# Altium PCB hermes2.PcbDoc
Units mm, origin at the board's own origin, x right, y up, seen from the top; angles counter-clockwise.
Board outline 24.7 x 46.36 mm, 4 copper layers (Top Layer, Layer 1, Layer 2, Bottom Layer), stack 0.603 mm thick; 16 components, 26 nets, 110 pads, 85 vias.
Unrouted connection lines stored in the file: 1.
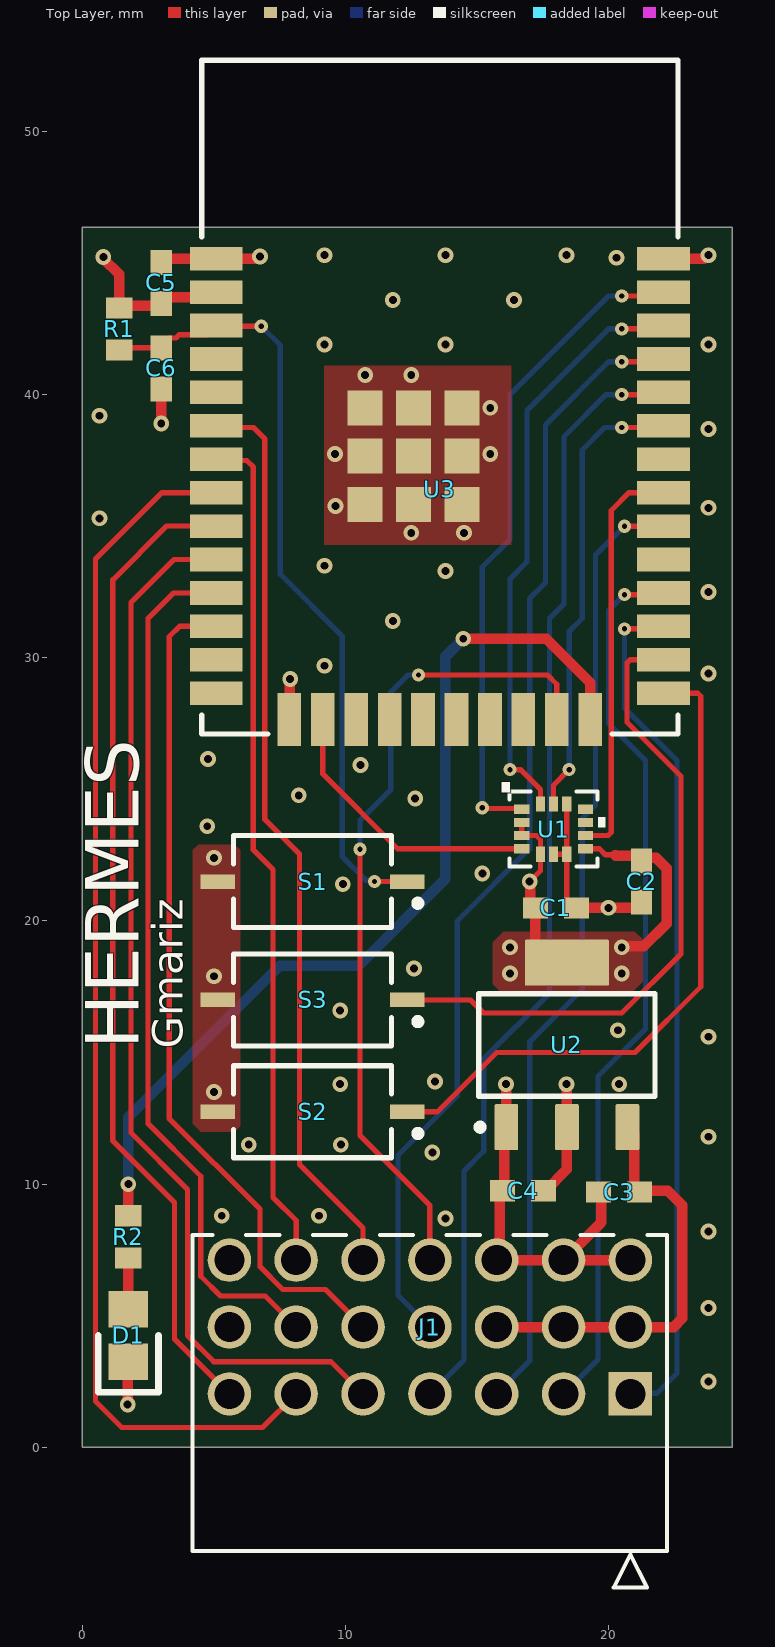
[diagram p0: Top Layer view]
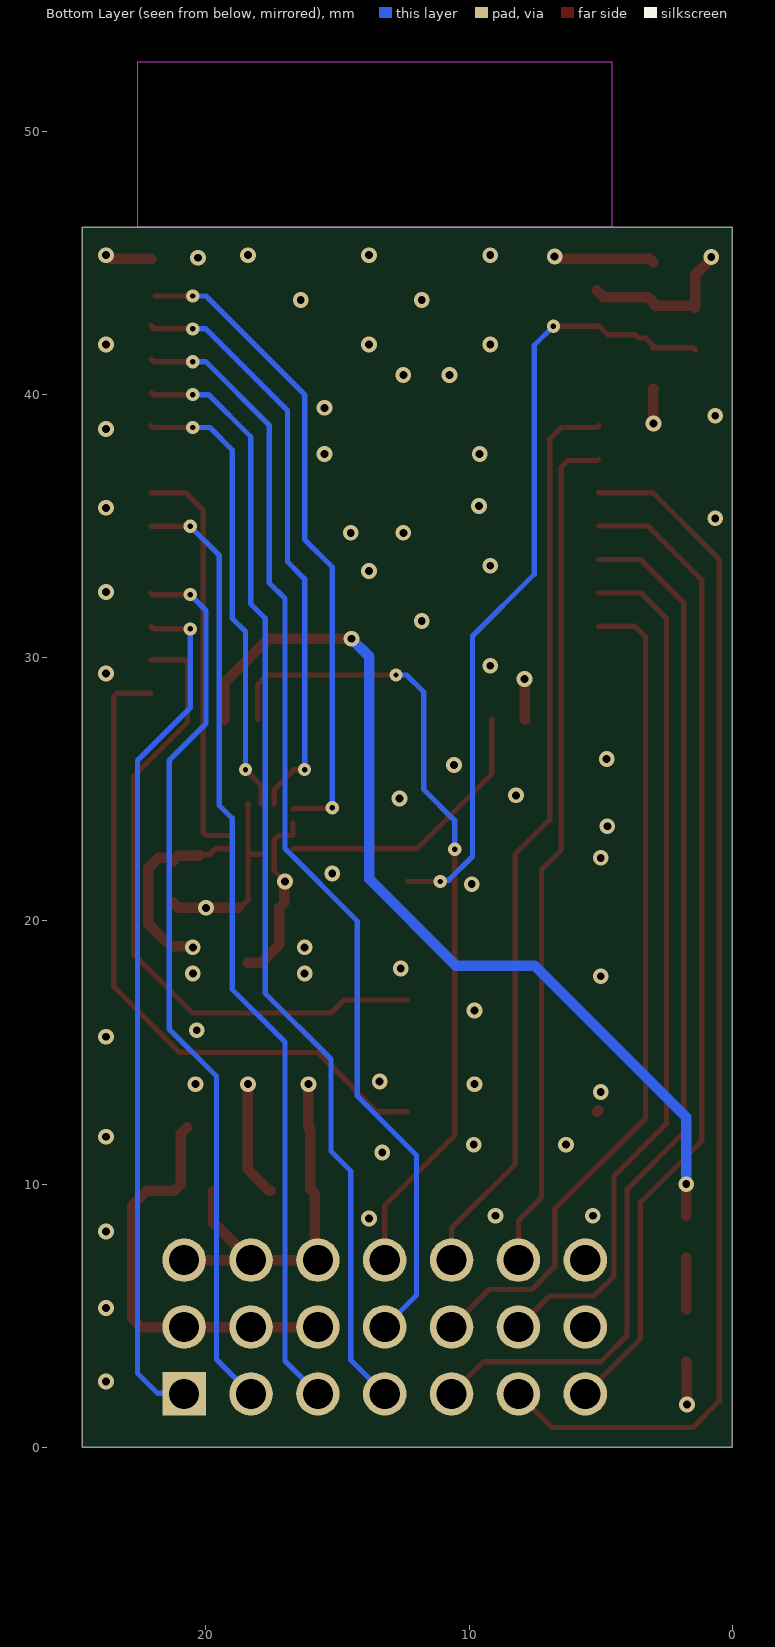
[diagram p1: Bottom Layer view, seen from below]
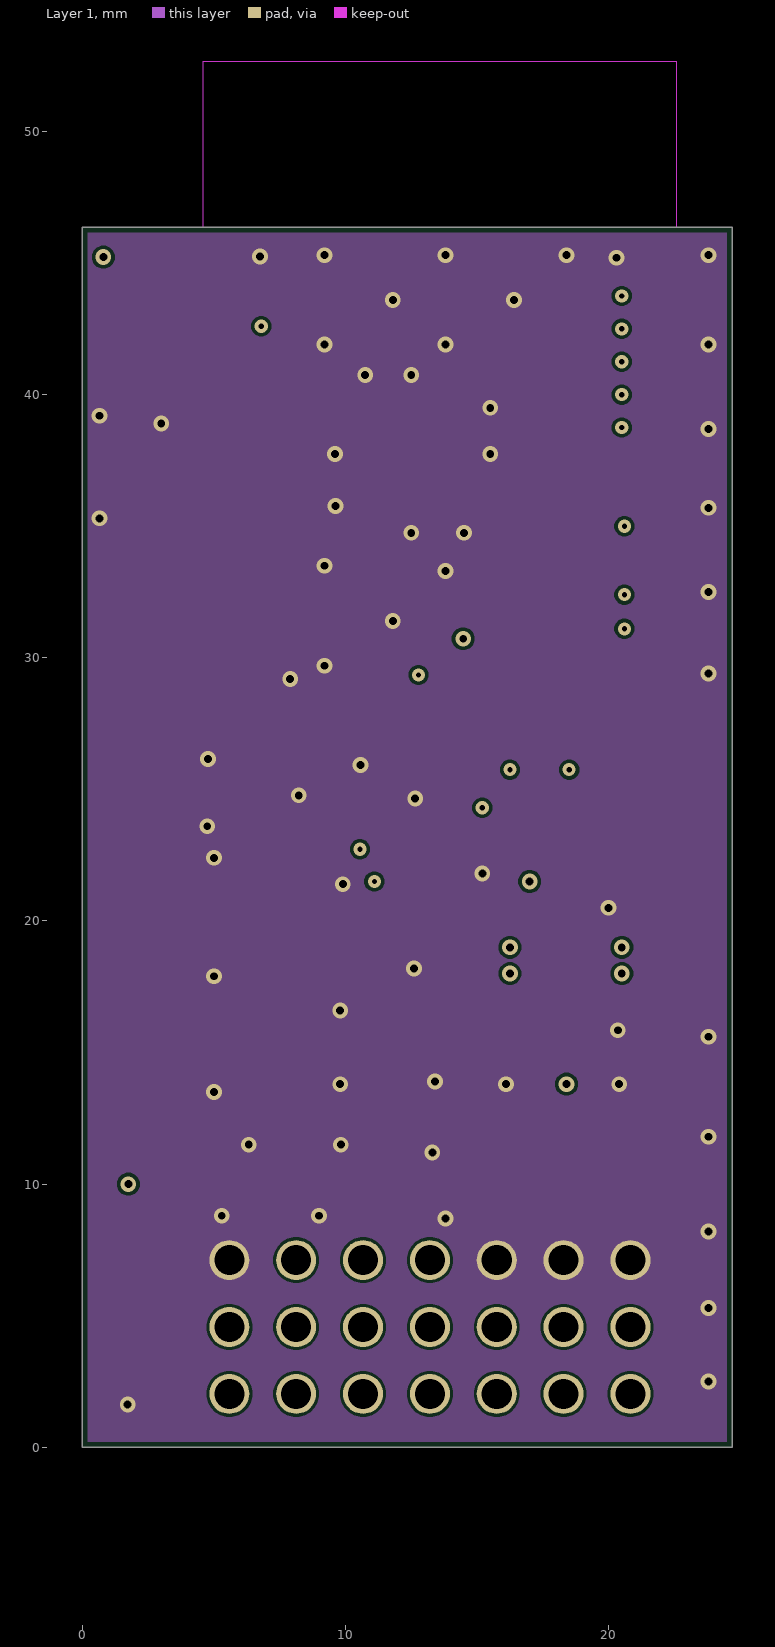
[diagram p2: Layer 1]
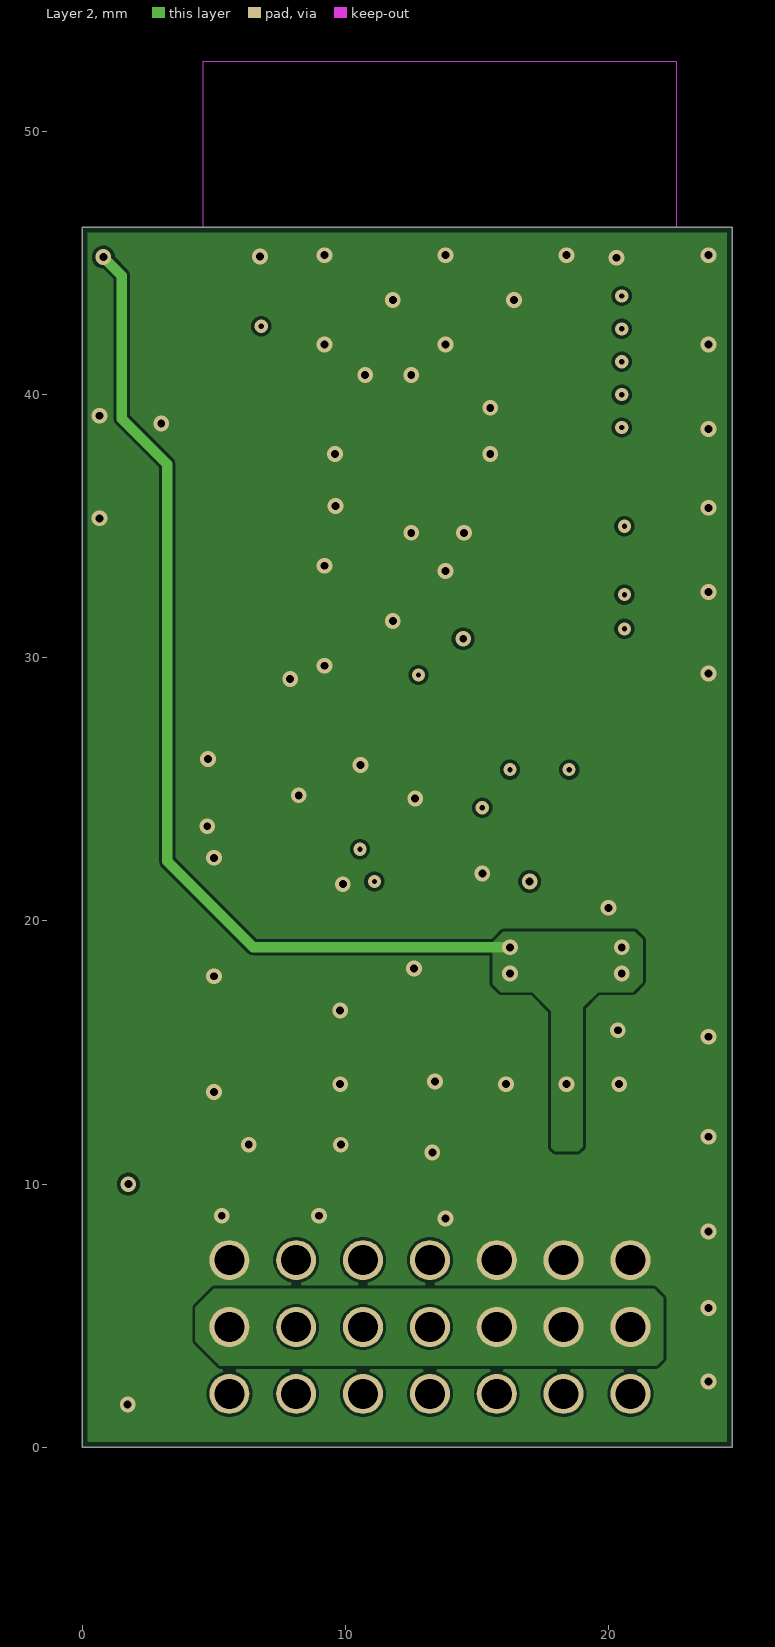
[diagram p3: Layer 2]
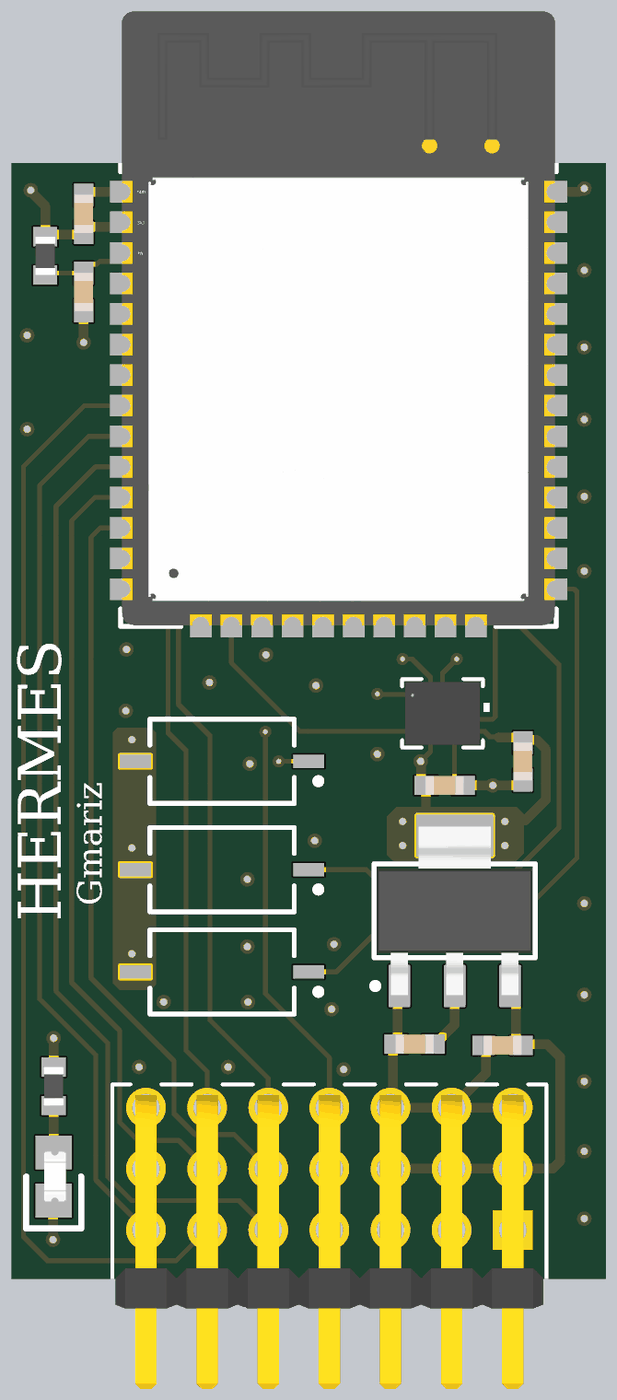
[diagram p4: 3D render of the assembled board from above, using the file's embedded part models]

## Layer stack, top to bottom
Top Solder: solder mask 0.0102, Solder Resist, Dk 3.5
Top Layer: signal copper 0.0356
Dielectric 2: prepreg 0.0711, PP-006, Dk 4.1
Layer 1: signal copper 0.035
Dielectric 1: dielectric 0.32, FR-4, Dk 4.8
Layer 2: signal copper 0.035
Dielectric 3: prepreg 0.0711, PP-006, Dk 4.1
Bottom Layer: signal copper 0.0356
Bottom Solder: solder mask 0.0102, Solder Resist, Dk 3.5

## Board outline
0,0 0,46.355 24.7,46.355 24.7,0

## Design rules (kind name [scope] priority, off if disabled: settings)
BoardOutlineClearance [All] p1: gap=0.2 ignorepadtopadclearanceinfootprint=FALSE
Clearance [All] p1: gap=0.102 ignorepadtopadclearanceinfootprint=FALSE except(0.127: Arc-Via Track-Via SMDPad-Via THPad-Via Via-Via Via-Fill Via-Poly Via-Region Via-Text; 0.25: Arc-Hole Track-Hole SMDPad-Hole THPad-Hole Via-Hole Fill-Hole Poly-Hole Region-Hole Text-Hole)
ComponentClearance [All] p1: gap=0.102 collisioncheckmode=3 verticalgap=0.102 showdistances=TRUE
DiffPairsRouting [All] p1: maxlimit=0.102 minlimit=0.102 mostfreqgap=0.102 toplayer_minwidth=0.102 toplayer_maxwidth=1816.048 toplayer_prefwidth=0.102 midlayer1_minwidth=0.102 midlayer1_maxwidth=1816.048 midlayer1_prefwidth=0.102 midlayer2_minwidth=0.102 midlayer2_maxwidth=1816.048 midlayer2_prefwidth=0.102 bottomlayer_minwidth=0.102 bottomlayer_maxwidth=1816.048 bottomlayer_prefwidth=0.102 maxuncoupledlength=12.7
Height [All] p1: minheight=0 maxheight=1816.048 prefheight=12.7
HoleSize [All] p1: absolutevalues=TRUE maxlimit=6.3 minlimit=0.2 maxpercent=80.000 minpercent=20.000
HoleToHoleClearance [All] p1: gap=0.25 allowstackedmicrovias=FALSE
MinimumAnnularRing [All] p1: minimumring=0.076
MinimumSolderMaskSliver [All] p1: minsoldermaskwidth=0
PlaneClearance [All] p1: clearance=0.102
PlaneConnect PlaneConnectPowerPads [InPadClass('PowerPads')] p1: planeconnectstyle=Direct reliefexpansion=0.508 reliefentries=4 reliefconductorwidth=0.254 reliefairgap=0.254
PlaneConnect [All] p2: pad.planeconnectstyle=Relief pad.reliefexpansion=0.3 pad.reliefentries=4 pad.reliefconductorwidth=0.102 pad.reliefairgap=0.102 via.planeconnectstyle=Direct via.reliefexpansion=0.3 via.reliefentries=4 via.reliefconductorwidth=0.127 via.reliefairgap=0.127
PolygonConnect PolygonConnectPowerPads [All vs (InPadClass('PowerPads'))] p1: connectstyle=Direct reliefconductorwidth=0.254 reliefentries=4 polygonreliefangle="90 Angle" airgapwidth=0.254
PolygonConnect [All] p2: connectstyle=Direct reliefconductorwidth=0.102 reliefentries=4 polygonreliefangle="90 Angle" airgapwidth=0.102
RoutingVias [All] p1: holewidth=0.2 width=0.45 viastyle="Through Hole" minholewidth=0.2 minwidth=0.45 maxholewidth=6.3 maxwidth=6.55
SilkToSilkClearance [All] p1: silktosilkclearance=0
SilkToSolderMaskClearance [IsPad] p1: minsilkscreentomaskgap=0.102 clearancetoexposedcopper=TRUE
SolderMaskExpansion [All] p1: expansion=0.075 istentingtop=FALSE
SupplyNets "Schematic Supply Nets_3" [InNet('+3V3')] p1: voltage=0.000
SupplyNets "Schematic Supply Nets_2" [InNet('GND')] p2: voltage=0.000
SupplyNets "Schematic Supply Nets" [InNet('+5')] p3: voltage=0.000
Width [All] p1: maxlimit=1816.048 minlimit=0.102 preferedwidth=0.102
20 further rules are at their usual default settings.

## Components (designator, comment, footprint, x,y, rotation, side; value= is the part's Value field where it differs from the comment)
C1 "CAP" 0603 18,20.5 r180 top
C2 "CAP" 0603 21.25,21.5 r90 top
C3 "CAP" 0603 20.4,9.7 r0 top
C4 "CAP" 0603 16.75,9.75 r0 top
C5 "CAP" 0603 3,44.25 r270 top (schematic designator C6)
C6 "CAP" 0603 3,41 r90 top (schematic designator C5)
D1 "LED" "LED 0805" 1.75,4.25 r270 top
J1 "TSW-107-08-T-T-RA" TSW-107-08-T-T-RA_SAI 20.828,2.032 r180 top
R1 "RESISTOR" "RES 0603" 1.4,42.5 r90 top value=10k
R2 "RESISTOR" "RES 0603" 1.75,8 r90 top value=10k
S1 "PushButtonSMD" PUSHBUTTON.SMD 8.75,21.5 r180 top
S2 "PushButtonSMD" PUSHBUTTON.SMD 8.75,12.75 r180 top
S3 "PushButtonSMD" PUSHBUTTON.SMD 8.75,17 r180 top
U1 "LSM6DSRXTR" LGA-14L_STM 17.907,23.495 r0 top
U2 "TLV1117LV33" DCY0004A_N 18.415,15.29 r90 top
U3 "ESP32-WROOM-32" FP-ESP32-WROOM-32-MFG 13.585,39.905 r0 top

## Footprints (in the part's own frame and the unit in brackets; to place one, negate y for a bottom-side part, rotate by r counter-clockwise, add the part's x,y. Pads: shape width x height; smd on the part's side, far side on the other; paste and mask are expansions set on the pad)
0603 [mm]
  rect 0.95x0.8 smd: 1(-0.78,0) 2(0.78,0)
  body extent -0.8,-0.4 0.8,0.4, height 0.78
DCY0004A_N [mm] "SOT223, 4-Leads, Body 6.7x3.7mm, Pitch 2.3mm, IPC Medium Density"
  rrect11% 1.75x0.9 smd: 1(-3.125,2.3) 2(-3.125,0) 3(-3.125,-2.3)
  rrect6% 1.75x3.2 smd: 4(3.125,0)
  silkscreen extent -3.25,-3.35 1.95,3.42, body extent -3.5,-3.25 3.5,3.25, height 1.62
FP-ESP32-WROOM-32-MFG [mm]
  rect 2x0.9 smd paste+0 mask+0: 1(-8.5,5.26) 2(-8.5,3.99) 3(-8.5,2.72) 4(-8.5,1.45) 5(-8.5,0.18) 6(-8.5,-1.09) 7(-8.5,-2.36) 8(-8.5,-3.63) 9(-8.5,-4.9) 10(-8.5,-6.17) 11(-8.5,-7.44) 12(-8.5,-8.71) 13(-8.5,-9.98) 14(-8.5,-11.25) 25(8.5,-11.25) 26(8.5,-9.98) 27(8.5,-8.71) 28(8.5,-7.44) 29(8.5,-6.17) 30(8.5,-4.9) 31(8.5,-3.63) 32(8.5,-2.36) 33(8.5,-1.09) 34(8.5,0.18) 35(8.5,1.45) 36(8.5,2.72) 37(8.5,3.99) 38(8.5,5.26)
  rect 0.9x2 smd paste+0 mask+0: 15(-5.715,-12.25) 16(-4.445,-12.25) 17(-3.175,-12.25) 18(-1.905,-12.25) 19(-0.635,-12.25) 20(0.635,-12.25) 21(1.905,-12.25) 22(3.175,-12.25) 23(4.445,-12.25) 24(5.715,-12.25)
  rect 1.33x1.33 smd paste+0 mask+0: 39(-2.835,-4.075) 39(-2.835,-2.24) 39(-2.835,-0.405) 39(-1,-4.075) 39(-1,-2.24) 39(-1,-0.405) 39(0.835,-4.075) 39(0.835,-2.24) 39(0.835,-0.405)
  Keep-Out Layer region: -9,6.45 9,6.45 9,12.75 -9,12.75
  Keep-Out Layer region: -9,6.45 9,6.45 9,12.75 -9,12.75
  silkscreen extent -9.05,-12.8 9.05,12.8, body extent -9.6,-13.35 9.6,12.9, height 0.25
"LED 0805" [mm] "0805"
  rect 1.4x1.5 smd: 1(-1,0) 2(1,0)
  silkscreen extent 0,-1.14 2.16,1.14, body extent -1.03,-0.4 1.03,0.51, height 0.85
LGA-14L_STM [mm] "SOT223, 4-Leads, Body 6.7x3.7mm, Pitch 2.3mm, IPC Medium Density"
  rect 0.577x0.352 smd paste+0 mask+0.05: 1(-1.21,0.75) 2(-1.21,0.25) 3(-1.21,-0.25) 4(-1.21,-0.75) 8(1.21,-0.75) 9(1.21,-0.25) 10(1.21,0.25) 11(1.21,0.75)
  rect 0.352x0.577 smd paste+0 mask+0.05: 5(-0.5,-0.956) 6(0,-0.956) 7(0.5,-0.956) 12(0.5,0.956) 13(0,0.956) 14(-0.5,0.956)
  silkscreen extent -1.68,-1.42 1.96,1.42, body extent -1.55,-1.3 1.55,1.3, height 0.87
PUSHBUTTON.SMD [mm] "SODFL, 2-Leads, Body 3,40x7,98mm, IPC Medium Density"
  rect 1.3x0.55 smd: 1(-3.6,0) 2(3.6,0)
  silkscreen extent -4.13,-1.75 3,1.75, body extent -3,-1.75 3,1.75, height 2
"RES 0603" [mm]
  rect 0.8x1 smd: 1(-0.8,0) 2(0.8,0)
  body extent -0.8,-0.41 0.8,0.41, height 0.46
TSW-107-08-T-T-RA_SAI [mil]
  rect 65x65 / inner round 60 / far side rect 65x65 hole 45 paste-99999 mask+0: 1(0,0)
  round 65 / inner round 60 / far side round 65 hole 45 paste-99999 mask+0: 2(100,0) 3(200,0) 4(300,0) 5(400,0) 6(500,0) 7(600,0) 8(0,-100) 9(100,-100) 10(200,-100) 11(300,-100) 12(400,-100) 13(500,-100) 14(600,-100) 15(0,-200) 16(100,-200) 17(200,-200) 18(300,-200) 19(400,-200) 20(500,-200) 21(600,-200)
  silkscreen extent -55,-238 655,290, body extent -50,-221 650,260, height 300

## Part data
C1 C2 C3 C4 C5 C6: library part "CAP. CERÂMICO", "Capacitor", Criado em=26/06/2012, Criador por="Luigi Eduardo", Pertence a=Trincabotz
  C1 C2 C3 C4 C6: Valor=100nF
  C5: Valor=1uF
J1: "No Description Available", Mfr_Name="Samtec Inc", RefDes=RefDes, Type=Type
R1 R2: "Resistor"
U1: "No Description Available", Mfr_Name=STMicroelectronics, RefDes=RefDes, Type=Type
U2: library part CMP-0395-00503-2, "Single Output LDO, 1 A, Fixed 3.3 V Output, 2 to 5.5 V Input, 4-pin SOT-223 (DCY), -40 to 125 degC, Green (RoHS & no Sb/Br)", Manufacturer="Texas Instruments", PartNumber=TLV1117LV33DCYR, Accuracy(%)=2, Code_JEDEC=TO-261, ComponentLink1Description="Manufacturer URL", ComponentLink1URL=http://www.ti.com/, ComponentLink2Description=Datasheet, ComponentLink2URL=http://www.ti.com/general/docs/lit/getliterature.tsp?genericPartNumber=TLV1117LV33&fileType=pdf, ComponentLink3Description="Package Specification", ComponentLink3URL=http://www.ti.com/litv/pdf/mpds094a, DatasheetVersion=SBVS160A, Eco-Plan="Green (RoHS & no Sb/Br)", Fixed Output Options(V)=3.3, Iout(Max)(A)=1, Iq(Typ)(mA)=0.05, Mounting Technology="Surface Mount", PackageDescription="4-Pin Plastic Small Outline, Body 3.5 x 6.5 mm, Pitch 2.3 mm", PackageReference=DCY0004A, PackageVersion=4202506/B, SubFamily="Single Channel LDO", Vdo(Typ)(mV)=1200, Vin(Max)(V)=5.5, Vin(Min)(V)=2, Vout Adj(Max)(V)=3.3, Vout Adj(Min)(V)=3.3
U3: library part CMP-194065-000008-1, "RX TXRX MOD WIFI SURFACE MOUNT", Case/Package=SMD/SMT, Frequency=2.5GHz, Max Operating Temperature=85°C, Min Operating Temperature=-40°C, Operating Supply Voltage=3.6V, Package Quantity=550, Data Rate=150Mbps, Mount="Surface Mount", Packaging="Cut Tape", Sensitivity=-98dBm, Weight=0.088185oz

## Via types
v1: diameter 0.6, hole 0.3, Top Layer to Bottom Layer, tented both sides, 70 vias
v2: diameter 0.5, hole 0.2, Top Layer to Bottom Layer, tented both sides, 15 vias

## Nets (pads, with @x,y where several pads share a name; then routed paths per layer and width w, separated by ;. In a path a pad name is that pad's centre, name@x,y a point inside that pad or via, vN(x,y) a via of type N, cw(c..) or ccw(c..) an arc to the next point about the centre after c; other vN are vias at no path point)
+3V3: C1.2 C2.2 C4.2 C5.2 R1.2 U1.2 U1.3 U1.5 U1.8 U2.2 U2.4 U3.2 | length 63.1
  Top Layer w0.2: U1.2 U1.3 17.255,23.245 17.407,23.093 U1.5 17.407,21.907 v1(17,21.5) ; U1.8 19.655,22.745 19.886,22.514 20.236,22.514 20.25,22.5
  Top Layer w0.4: v1(0.8,45.225) 0.8,45.171 1.4,44.571 R1.2 1.485,43.385 2.915,43.385 C5.2 3,43.5 3.2,43.7 4.89,43.7 U3.2@5.152,43.962 ; v1(17,21.5) 17.019,21.481 C1.2@17.019,20.7 ; C1.2 17.22,19.09 17.895,18.415 U2.4 ; C4.2 17.605,9.75 18.415,10.56 U2.2 18.407,12.173 18.407,13.793 v1(18.4,13.8) ; 20.25,22.5 20.269,22.481 C2.2@21.05,22.481 ; v1(20.5,19) 20.538,19.038 21.338,19.038 22.2,19.9 22.2,22 21.8,22.4 21.37,22.4 C2.2
  Layer 2 w0.4: v1(0.8,45.225) 1.5,44.525 1.5,39.087 3.225,37.362 3.225,22.275 6.5,19 v1(16.25,19)
  other v1: 16.25,18 20.5,18
+5: C3.2 J1.8 J1.9 J1.10 J1.14 U2.3 | length 15.9
  Top Layer w0.4: J1.10 J1.9 J1.8 22.472,4.572 22.8,4.9 22.8,9.2 22.25,9.75 21.205,9.75 20.965,9.99 20.965,11.915 U2.3
ADC1IN: J1.19 U3.6 | length 34.8
  Top Layer w0.2: U3.6 5.15,38.75 6.5,38.75 6.937,38.313 6.937,23.863 8.25,22.55 8.25,10.75 10.668,8.332 J1.19
ADC2IN: J1.20 U3.7 | length 32.3
  Top Layer w0.2: U3.7 5.13,37.5 6.25,37.5 6.5,37.25 6.5,22.7 7.25,21.95 7.25,9.5 8.128,8.622 J1.20
BOOT: S2.1 U3.25 | length 25.6
  Top Layer w0.2: S2.1 13.5,12.75 15.75,15 21,15 23.5,17.5 23.5,28.538 23.383,28.655 U3.25
BOTAO: S3.1 U3.26 | length 24.9
  Top Layer w0.2: S3.1 14.75,17 15.25,16.5 20.5,16.5 22.75,18.75 22.75,25.5 20.7,27.55 20.7,29.808 20.817,29.925 U3.26
DEBUG: R2.2 U3.24 | length 35.9
  Top Layer w0.4: R2.2 v1(1.75,10) ; v1(14.475,30.725) 17.625,30.725 19.3,29.05 U3.24
  Bottom Layer w0.4: v1(1.75,10) 1.75,12.55 7.5,18.3 10.5,18.3 13.8,21.6 13.8,30.05 v1(14.475,30.725)
Enable_ESP: C6.2 R1.1 S1.1 U3.3 | length 30.1
  Top Layer w0.2: R1.1 1.48,41.78 C6.2 3,41.855 3.3,42.155 3.555,42.155 3.675,42.275 4.735,42.275 U3.3 5.11,42.6 v2(6.8,42.6) ; v2(11.1,21.5) S1.1
  Bottom Layer w0.2: v2(6.8,42.6) 7.525,41.875 7.525,33.175 9.875,30.825 9.875,22.45 10.774,21.551 11.049,21.551 v2(11.1,21.5)
ESC1IN: J1.7 U3.9 | length 37.5
  Top Layer w0.2: U3.9 3.205,35.005 1.162,32.962 1.162,11.638 3.5,9.3 3.5,4.12 J1.7
ESC1OUT: J1.1 U3.27 | length 32.7
  Top Layer w0.2: v2(20.6,31.1) 21.99,31.1 U3.27
  Bottom Layer w0.2: v2(20.6,31.1) 20.6,28.1 22.6,26.1 22.6,2.818 21.836,2.054 20.85,2.054 J1.1
ESC2IN: J1.6 U3.8 | length 46.2
  Top Layer w0.2: U3.8 3.025,36.275 0.5,33.75 0.5,1.75 1.5,0.75 6.846,0.75 J1.6
ESC2OUT: J1.2 U3.28 | length 34
  Top Layer w0.2: v2(20.6,32.4) 22.02,32.4 U3.28
  Bottom Layer w0.2: J1.2 19.6,3.344 19.6,14.1 21.4,15.9 21.4,26.1 20,27.5 20,31.8 v2(20.6,32.4)
ESC3IN: J1.5 U3.10 | length 40.2
  Top Layer w0.2: U3.10 3.485,33.735 1.848,32.098 1.848,11.952 4,9.8 4,4.25 5,3.25 9.45,3.25 J1.5
ESC3OUT: J1.3 U3.30 | length 36.5
  Top Layer w0.2: v2(20.6,35) 22.08,35 U3.30
  Bottom Layer w0.2: J1.3 17,3.284 17,15.4 19,17.4 19,23.9 19.5,24.4 19.5,33.9 v2(20.6,35)
GND: C1.1 C2.1 C3.1 C4.1 C5.1 C6.1 D1.2 J1.15 J1.16 J1.17 J1.21 S1.2 S2.2 S3.2 U1.6 U1.7 U1.12 U2.1 U3.1 U3.15 U3.38 U3.39 | length 32.5
  Top Layer w0.2: U1.6 U1.7 ; U1.12 U1.7 ; C1.1 18.707,20.5 18.407,20.8 U1.7
  Top Layer w0.4: v1(1.725,1.625) 1.725,3.225 D1.2 ; v1(3,38.9) C6.1 ; C5.1 3.135,45.165 6.611,45.165 6.696,45.25 v1(6.75,45.25) ; S2.2@5.1,12.8 S2.2 ; U3.15 7.885,27.67 7.885,29.185 v1(7.9,29.2) ; v1(16.1,13.8) 16.107,13.793 16.107,12.173 U2.1 16.042,12.093 16.042,9.823 C4.1 15.859,9.639 15.859,7.223 J1.17 J1.16 ; C1.1 v1(20,20.5) ; C3.1@19.72,9.75 19.72,8.544 J1.16 ; v1@20.027,20.5 21.05,20.5 21.25,20.7 C2.1 ; J1.15 J1.16 ; U3.38 23.611,45.165 23.746,45.3 v1(23.8,45.3)
  other v1: 23.8,2.5 23.8,5.3 23.8,8.2 13.8,8.7 5.3,8.8 9,8.8 13.3,11.2 6.325,11.5 9.825,11.5 23.8,11.8 5,13.5 9.8,13.8 20.4,13.8 13.4,13.9 23.8,15.6 20.35,15.85 9.8,16.6 5,17.9 12.6,18.2 9.9,21.4 15.2,21.8 5,22.4 4.75,23.6 12.65,24.65 8.225,24.775 10.575,25.925 4.775,26.15 23.8,29.4 9.2,29.7 11.8,31.4 23.8,32.5 13.8,33.3 9.2,33.5 12.5,34.75 14.5,34.75 0.65,35.3 23.8,35.7 9.624,35.769 9.601,37.747 15.5,37.75 23.8,38.7 0.65,39.2 15.5,39.5 10.75,40.75 12.5,40.75 9.2,41.9 13.8,41.9 23.8,41.9 11.8,43.6 16.4,43.6 20.3,45.2 9.2,45.3 13.8,45.3 18.4,45.3
INT1IMU: U1.4 U3.16 | length 10.8
  Top Layer w0.2: U3.16 9.14,25.585 11.98,22.745 U1.4
INT2IMU: U1.9 U3.31 | length 15.5
  Top Layer w0.2: U1.9 19.983,23.245 20.1,23.362 20.1,35.6 20.775,36.275 U3.31
NetD1_1: D1.1 R2.1 | length 1.9
  Top Layer w0.4: D1.1 R2.1
PWMOUT: J1.18 U3.23 | length 31.2
  Top Layer w0.2: v2(10.55,22.725) 10.55,11.85 13.208,9.192 J1.18 ; v2(12.775,29.35) 17.675,29.35 18.03,28.995 U3.23
  Bottom Layer w0.2: v2(10.55,22.725) 10.55,23.825 11.725,25 11.725,28.7 12.375,29.35 v2(12.775,29.35)
RX: J1.4 U3.34 | length 43
  Top Layer w0.2: v2(20.5,40) 22,40 U3.34
  Bottom Layer w0.2: J1.4 13.282,2.032 13.282,2.106 14.5,3.324 14.5,10.5 15.25,11.25 15.25,14.75 17.75,17.25 17.75,31.5 18.3,32.05 18.3,38.4 19.9,40 v2(20.5,40)
SCL: J1.13 U3.11 | length 33.2
  Top Layer w0.2: U3.11 3.465,32.465 2.5,31.5 2.5,12.3 4.5,10.3 4.5,6.5 5.25,5.75 6.95,5.75 J1.13
SDA: J1.12 U3.12 | length 32.2
  Top Layer w0.2: U3.12 3.695,31.195 3.3,30.8 3.3,12.5 6.75,9.05 6.75,6.865 7.615,6 9.24,6 J1.12
SPI_SDI: U1.14 U3.36 | length 22.2
  Top Layer w0.2: v2(16.25,25.75) 16.65,25.75 17.407,24.993 U1.14 ; v2(20.5,42.5) 21.96,42.5 U3.36
  Bottom Layer w0.2: v2(16.25,25.75) 16.25,33 16.9,33.65 16.9,39.4 20,42.5 v2@20.25,42.5
SPI_SDO: U1.1 U3.37 | length 24.9
  Top Layer w0.2: v2(15.2,24.3) 15.227,24.273 16.669,24.273 U1.1 ; v2(20.5,43.75) U3.37@21.94,43.75
  Bottom Layer w0.2: v2(15.2,24.3) 15.2,33.45 16.25,34.5 16.25,40 20,43.75 v2(20.5,43.75)
SPI_SPC: U1.13 U3.33 | length 17.4
  Top Layer w0.2: U1.13 17.907,25.157 v2(18.5,25.75) ; v2(20.5,38.75) 22.02,38.75 U3.33
  Bottom Layer w0.2: v2(18.5,25.75) 18.5,31 19,31.5 19,37.9 19.85,38.75 v2(20.5,38.75)
TX: J1.11 U3.35 | length 42.6
  Top Layer w0.2: v2(20.5,41.25) 21.98,41.25 U3.35
  Bottom Layer w0.2: J1.11 13.178,4.572 13.178,4.602 12,5.78 12,11.1 14.25,13.35 14.25,20 17,22.75 17,32.25 17.6,32.85 17.6,38.85 20,41.25 v2(20.5,41.25)
pads on no net: U1.10 U1.11 U3.4 U3.5 U3.13 U3.14 U3.17 U3.18 U3.19 U3.20 U3.21 U3.22 U3.29 U3.32

## Polygon pours and split planes (outlines as drawn)
+3V3 on Top Layer "NONET_L02_P-001" (solid, pour order 2): 15.6,19.2 16,19.6 21,19.6 21.3,19.3 21.3,17.7 20.9,17.3 15.9,17.3 15.6,17.6
GND on Top Layer "NONET_L02_P-001" (solid, pour order 3): 4.4,22.9 4.2,22.7 4.2,12.3 4.5,12 5.8,12 6,12.2 6,22.7 5.8,22.9
GND on Top Layer "NONET_L02_P-001" (solid, pour order 0): 9.2,41.1 16.3,41.1 16.3,34.3 9.2,34.3
GND on Layer 2 "NONET_L02_P-001" (solid, pour order 7): -5.525,45.4 2.525,53.45 2.525,54.95 37.85,54.95 37.525,54.625 37.525,-5.05 -0.15,-5.05 -5.525,0.325
+5 on Layer 2 "NONET_L02_P-001" (solid, pour order 6): 4.3,5.325 5,6.025 21.725,6.025 22.075,5.675 22.075,3.35 21.825,3.1 5.225,3.1 4.3,4.025
+3V3 on Layer 2 "NONET_L02_P-001" (solid, pour order 4): 17.95,11.25 17.825,11.375 17.825,16.575 17.1,17.3 15.9,17.3 15.6,17.6 15.6,19.2 16,19.6 21,19.6 21.3,19.3 21.3,17.675 20.925,17.3 19.607,17.3 19.025,16.718 19.025,16.325 19.025,11.425 18.85,11.25
GND on Layer 1 "NONET_L02_P-001" (solid, pour order 9): 34.55,54.95 32.35,52.75 -2.9,52.75 -2.9,40.55 -4.9,38.55 -3.35,37 -3.35,-14.275 30.575,-14.275 33.475,-11.375

## Silkscreen, mask and mechanical layers (free items; w line width, h text height)
Top Overlay:
  text "Gmariz" at 4.209,15.15 h2 r90
  text "HERMES" at 2.825,15.124 h3.5 r90

## Text inside footprints (layer, text, board x,y; h text height)
U1: Top 3D Body "*" at 16.617,23.86 h1.27